# Altium PCB Wikiot-Cover.PcbDoc
Units mm, origin at the board's own origin, x right, y up, seen from the top; angles counter-clockwise.
Board outline 32.77 x 33.15 mm, 2 copper layers (Top Layer, Bottom Layer); 3 components, 14 nets, 30 pads, 0 vias.
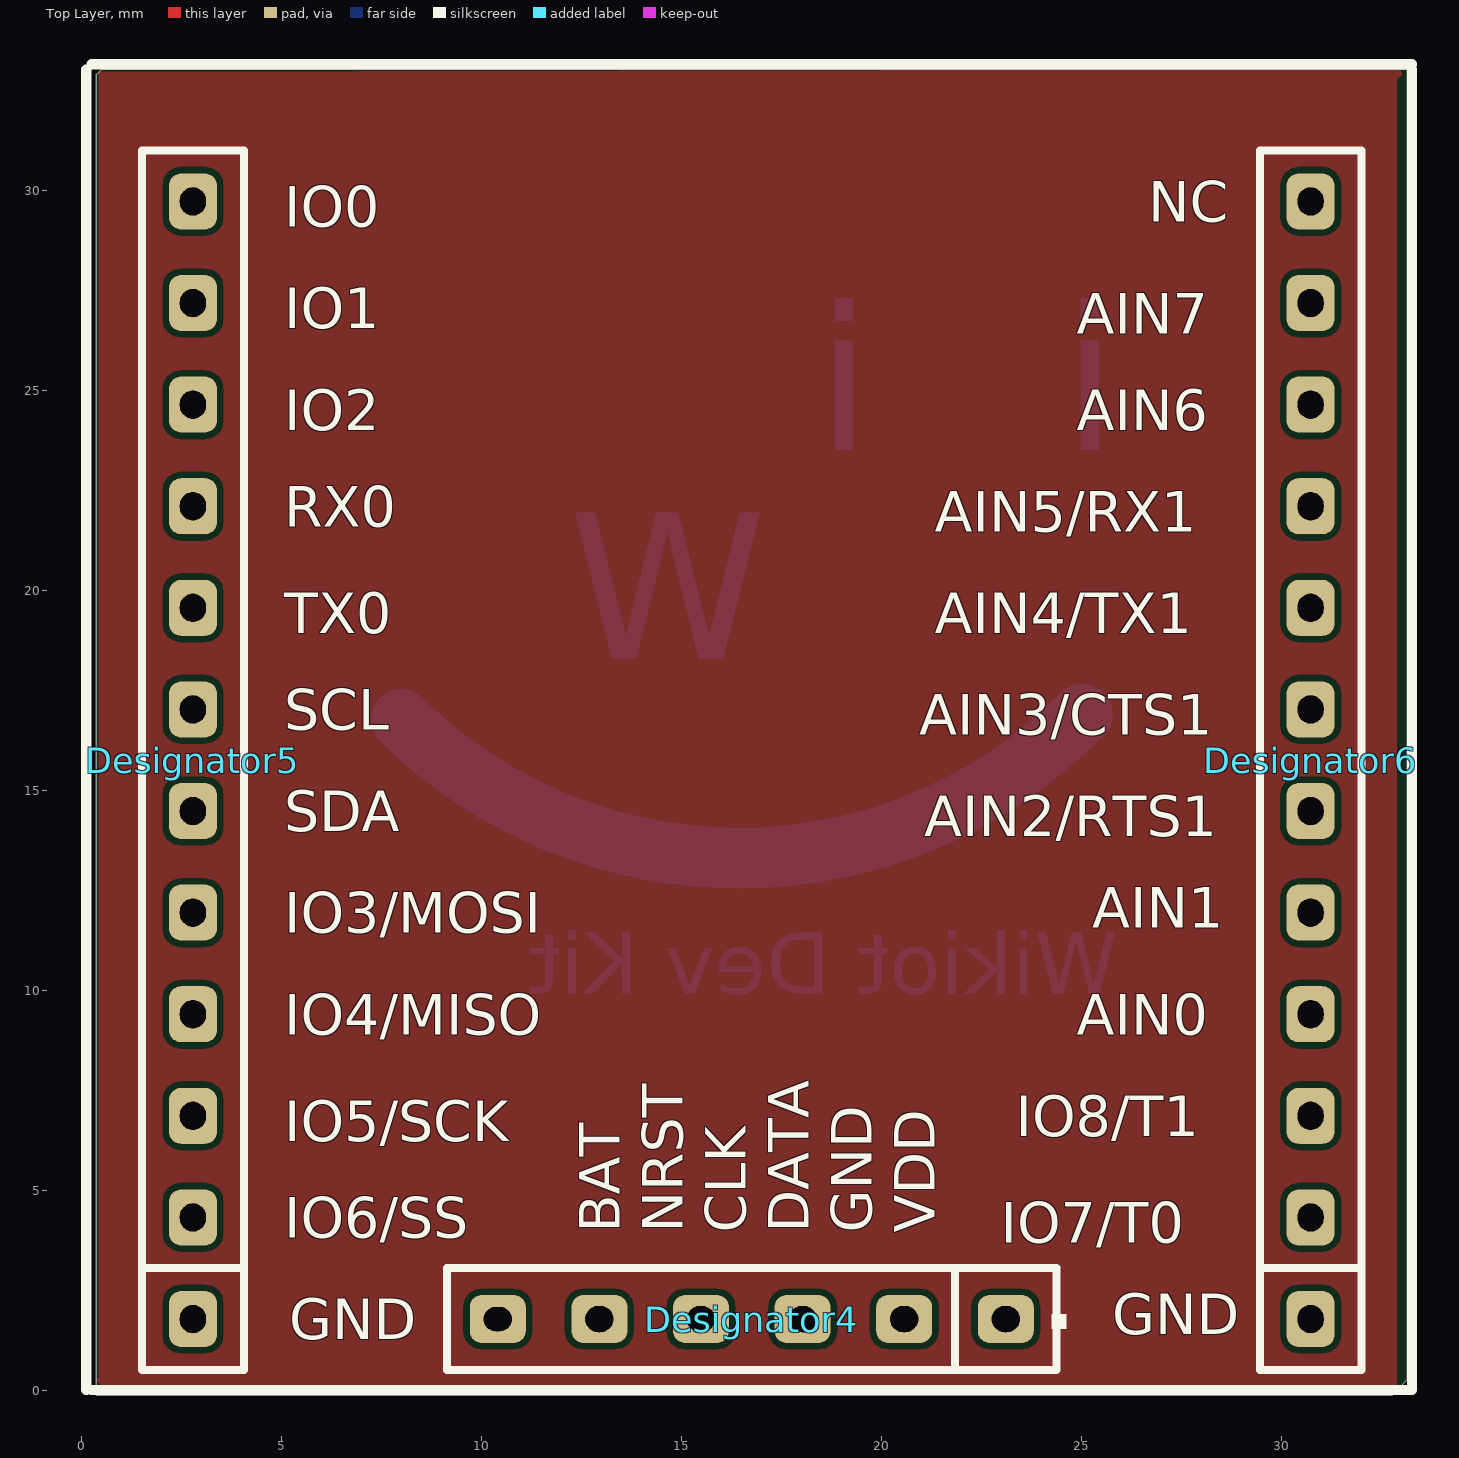
[diagram p0: Top Layer view]
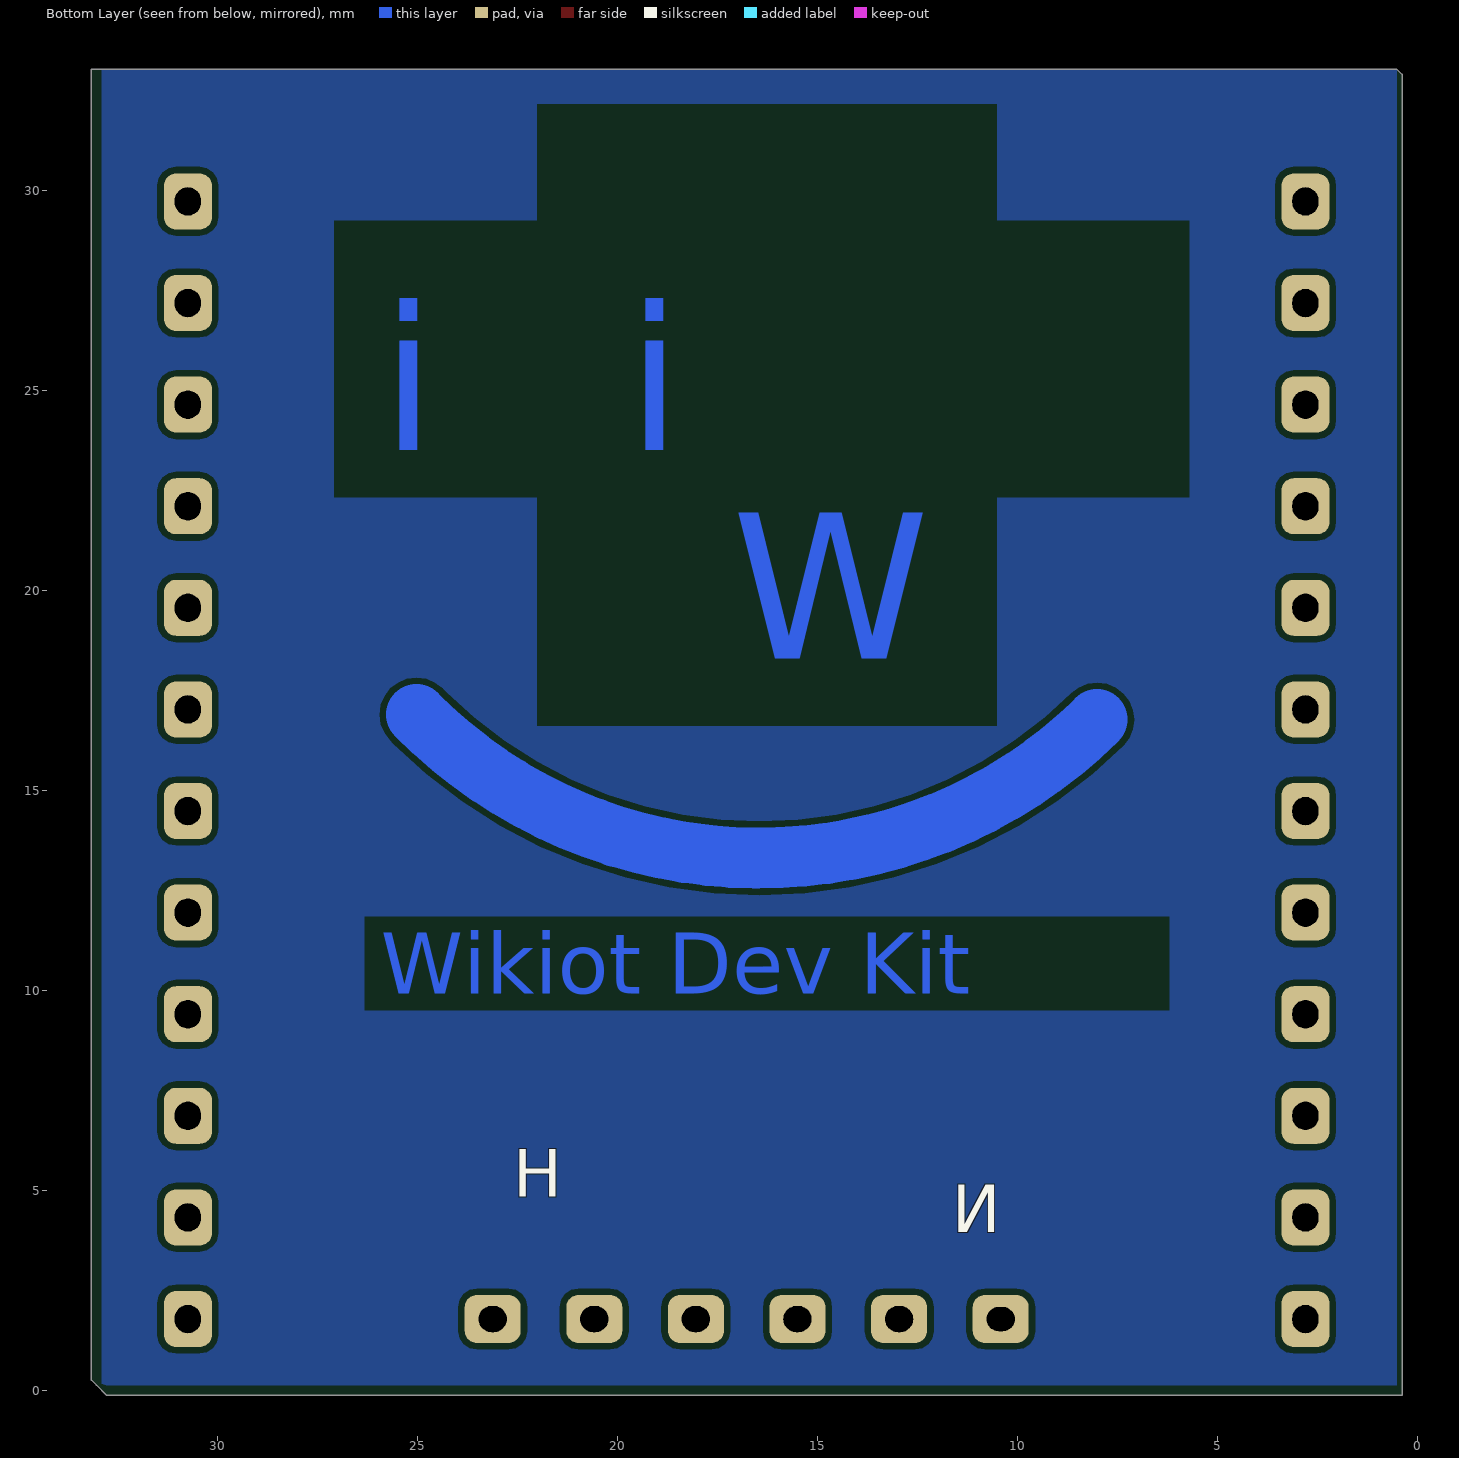
[diagram p1: Bottom Layer view, seen from below]

## Layer stack, top to bottom
Top Solder: solder mask 0.0102, Solder Resist, Dk 3.5
Top Layer: signal copper 0.0356
Dielectric1: dielectric 0.32, FR-4, Dk 4.8
Bottom Layer: signal copper 0.0356
Bottom Solder: solder mask 0.0102, Solder Resist, Dk 3.5

## Board outline
0.381,32.893 0.508,33.02 33.147,33.02 33.147,0.254 33.02,0.127 32.766,-0.127 0.381,-0.127

## Design rules (kind name [scope] priority, off if disabled: settings)
Clearance [All] p1: gap=0.152
PolygonConnect [All] p1: connectstyle=Relief reliefconductorwidth=0.254 reliefentries=4 polygonreliefangle="90 Angle" airgapwidth=0.254
RoutingVias [All] p1: holewidth=0.305 width=0.635 viastyle="Through Hole" minholewidth=0.305 minwidth=0.635 maxholewidth=0.711 maxwidth=1.27
SolderMaskExpansion [All] p1: expansion=0.102
Width [All] p1: maxlimit=1.397 minlimit=0.178 preferedwidth=0.254
29 further rules are at their usual default settings.

## Components (designator, comment, footprint, x,y, rotation, side; value= is the part's Value field where it differs from the comment)
Designator4 "Comment" HDR1X6-L/2.54MM 23.114,1.778 r180 top locked
Designator5 "Comment" HDR1X12-L/2.5MM 2.794,1.778 r90 top locked
Designator6 "Comment" HDR1X12-L/2.5MM 30.734,1.778 r90 top locked

## Footprints (in the part's own frame and the unit in brackets; to place one, negate y for a bottom-side part, rotate by r counter-clockwise, add the part's x,y. Pads: shape width x height; smd on the part's side, far side on the other; paste and mask are expansions set on the pad)
HDR1X6-L/2.54MM [mm] "Connector; Header; 6 Position"
  rrect50% 1.4x1.2 hole 0.65 slot 0.7 at 0 deg: 1(0,0) 2(2.54,0) 3(5.08,0) 4(7.62,0) 5(10.16,0)
  rrect50% 1.4x1.2 hole 0.6 slot 0.7 at 0 deg: 6(12.7,0)
  silkscreen extent -1.52,-1.27 13.97,1.27
HDR1X12-L/2.5MM [mm] "Connector; Header; 12 Position"
  rrect50% 1.4x1.2 hole 0.65 slot 0.7 at 0 deg: 1(0,0) 2(2.54,0) 3(5.08,0) 4(7.62,0) 5(10.16,0) 6(12.7,0) 7(15.24,0) 8(17.78,0) 9(20.32,0) 10(22.86,0) 11(25.4,0) 12(27.94,0)
  silkscreen extent -1.27,-1.27 29.21,1.27

## Nets (pads, with @x,y where several pads share a name; then routed paths per layer and width w, separated by ;. In a path a pad name is that pad's centre, name@x,y a point inside that pad or via, vN(x,y) a via of type N, cw(c..) or ccw(c..) an arc to the next point about the centre after c; other vN are vias at no path point)
CE: 
CSN: 
D3V3: 
GND: 
INT0: 
MISO: 
MOSI: 
NetP401_10: 
NetP401_11: 
NetP401_12: 
NetP402_2: 
NetP402_3: 
NRST: 
SCK: 
pads on no net: Designator4.1 Designator4.2 Designator4.3 Designator4.4 Designator4.5 Designator4.6 Designator5.1 Designator5.2 Designator5.3 Designator5.4 Designator5.5 Designator5.6 Designator5.7 Designator5.8 Designator5.9 Designator5.10 Designator5.11 Designator5.12 Designator6.1 Designator6.2 Designator6.3 Designator6.4 Designator6.5 Designator6.6 Designator6.7 Designator6.8 Designator6.9 Designator6.10 Designator6.11 Designator6.12
copper on no net: | length 18.9
  Bottom Layer w1.524: 8.001,16.764 ccw(c16.447,25.336) 25.019,16.891

## Polygon pours and split planes (outlines as drawn)
GND on Top Layer "Top Layer-No Net" (solid, pour order 8): 0.444,32.957 0.444,0.317 0.381,0.254 0.635,0 32.893,0 32.893,32.766 33.147,33.02
GND on Bottom Layer "Top Layer-No Net" (solid, pour order 10): 0.508,0.381 0.508,33.02 32.893,33.02 32.893,0 32.766,0.127 0.508,0.127

## Other copper
Bottom Layer:
  text "i   i" at 25.908,23.495 h4.57
  text "W" at 12.192,18.288 h12.19
  text "Wikiot Dev Kit" at 25.908,9.906 h1.52

## Silkscreen, mask and mechanical layers (free items; w line width, h text height)
Top Overlay:
  lines w0.254: 0.127,0 0.127,33.02 ; 0.254,0 33.274,0 33.274,33.02 ; 0.254,33.147 33.274,33.147
  text "NC" at 26.67,29.21 h1.02
  text "IO0" at 5.08,29.083 h1.02
  text "IO1" at 5.08,26.543 h1.02
  text "AIN7" at 24.892,26.416 h1.02
  text "IO2" at 5.08,24.003 h1.02
  text "AIN6" at 24.892,24.003 h1.02
  text "RX0" at 5.08,21.59 h1.02
  text "AIN5/RX1" at 21.336,21.463 h1.02
  text "TX0" at 5.08,18.923 h1.02
  text "AIN4/TX1" at 21.336,18.923 h1.02
  text "SCL" at 5.08,16.51 h1.02
  text "AIN3/CTS1" at 20.955,16.383 h1.02
  text "SDA" at 5.08,13.97 h1.02
  text "AIN2/RTS1" at 21.082,13.843 h1.02
  text "AIN1" at 25.273,11.557 h1.02
  text "IO3/MOSI" at 5.08,11.43 h1.02
  text "IO4/MISO" at 5.08,8.89 h1.02
  text "AIN0" at 24.892,8.89 h1.02
  text "IO8/T1" at 23.368,6.35 h1.02
  text "IO5/SCK" at 5.08,6.223 h1.02
  text "BAT" at 13.462,3.937 h1.02 r90
  text "NRST" at 15.037,3.937 h1.02 r90
  text "CLK" at 16.612,3.937 h1.02 r90
  text "DATA" at 18.186,3.937 h1.02 r90
  text "GND" at 19.761,3.937 h1.02 r90
  text "VDD" at 21.336,3.937 h1.02 r90
  text "IO6/SS" at 5.08,3.81 h1.02
  text "IO7/T0" at 22.987,3.683 h1.02
  text "GND" at 25.781,1.397 h1.02
  text "GND" at 5.207,1.27 h1.02
Bottom Overlay:
  text "H" at 22.606,4.445 h2.03
  text "N" at 10.414,3.556 h2.03
Bottom Solder:
  lines w1.524: 8.001,16.764 ccw(c16.446,25.336) 25.019,16.891
  text "i   i" at 25.908,23.495 h4.57
  text "W" at 12.192,18.288 h12.19
  text "Wikiot Dev Kit" at 25.908,9.906 h1.52